# Altium PCB ElectromagneticPositioning.PcbDoc (part 3 of 3)
Units mm, origin at the board's own origin, x right, y up, seen from the top; angles counter-clockwise.
Board outline 163.96 x 78.23 mm, 2 copper layers (Top Layer, Bottom Layer); 269 components, 166 nets, 989 pads, 249 vias.
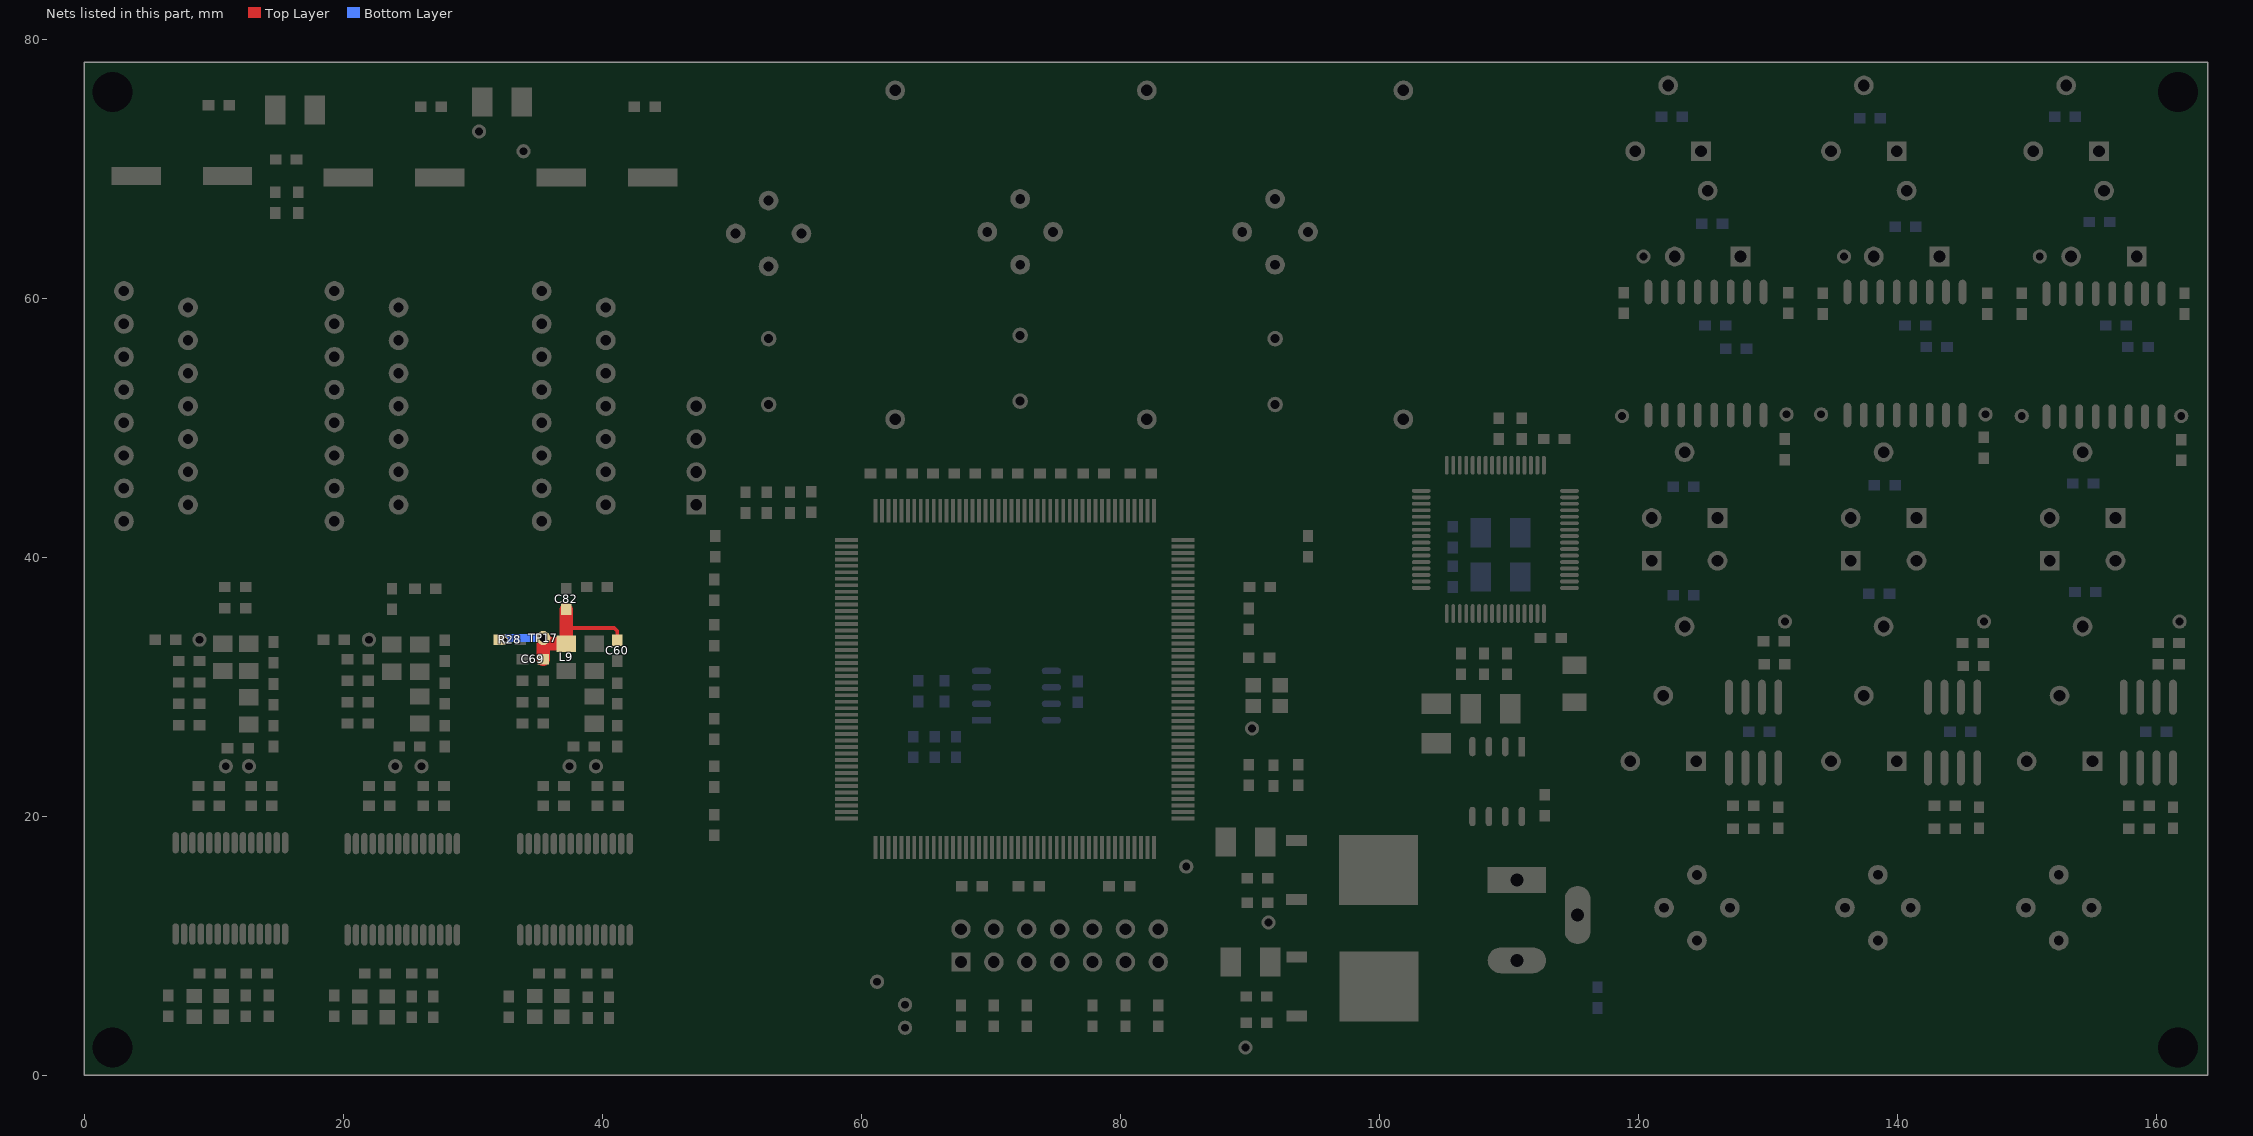
[diagram p3: the nets of this part, all layers, seen from the top]

## Via types
v1: diameter 0.305, hole 0.203, Top Layer to Bottom Layer, 111 vias
v2: diameter 0.381, hole 0.254, Top Layer to Bottom Layer, 76 vias
v3: diameter 0.457, hole 0.305, Top Layer to Bottom Layer, 34 vias
v4: diameter 0.508, hole 0.381, Top Layer to Bottom Layer, 14 vias
v5: diameter 0.457, hole 0.381, Top Layer to Bottom Layer, 8 vias
v6: diameter 0.762, hole 0.457, Top Layer to Bottom Layer, 4 vias
v7: diameter 0.508, hole 0.457, Top Layer to Bottom Layer, 1 vias
v8: diameter 0.559, hole 0.381, Top Layer to Bottom Layer, 1 vias

## Nets (pads, with @x,y where several pads share a name; then routed paths per layer and width w, separated by ;. In a path a pad name is that pad's centre, name@x,y a point inside that pad or via, vN(x,y) a via of type N, cw(c..) or ccw(c..) an arc to the next point about the centre after c; other vN are vias at no path point) (continued)
WAVE_C: C60.2 C69.2 C82.1 L9.2 R28.2 TP17.1 | length 14
  Top Layer w0.305: 37.211,34.544 40.915,34.544 41.148,34.311 C60.2@41.148,33.604
  Top Layer w1.016: C69.2@35.433,32.131 TP17.1@35.433,33.782 35.873,33.342 L9.2@37.211,33.342 37.211,34.544 C82.1@37.211,35.992
  Bottom Layer w0.61: v2(32.512,33.655) 32.639,33.782 TP17.1@35.433,33.782
pads on no net: P1.6 U3.27 U3.28 U3.35 U3.36 U3.37 U3.38 U3.39 U3.40 U3.41 U3.42 U3.46 U3.47 U3.48 U3.49 U3.50 U3.51 U3.52 U3.53 U3.65 U3.66 U3.67 U3.68 U3.69 U3.72 U3.73 U3.74 U3.75 U3.81 U3.82 U3.102 U3.115 U3.116 U3.119 U3.122 U3.123 U3.124 U3.135 U3.136 U3.137 U3.138 U3.141 U3.142 U3.145 U3.148 U3.149 U3.150 U3.151 U3.152 U3.153 U3.156 U3.157 U3.158 U3.161 U3.162 U3.163 U3.164 U3.165 U3.168 U3.169 U3.172 U3.173 U3.174 U3.175 U4.6 U5.13 U5.14 U5.15 U5.16 U6.13 U6.14 U6.15 U6.16 U7.13 U7.14 U7.15 U7.16 U8.5 U8.10 U8.11 U8.14 U8.15 U9.5 U9.10 U9.11 U9.14 U9.15 U10.5 U10.10 U10.11 U10.14 U10.15 U11.2 U11.3 U11.5 U11.6 U11.7 U11.13 U11.15 U12.2 U12.3 U12.5 U12.6 U12.7 U12.13 U12.15 U13.2 U13.3 U13.5 U13.6 U13.7 U13.13 U13.15 U14.1 U14.6 U14.7 U15.15 X1.1 X2.1 X3.1 X4.1

## Polygon pours and split planes (outlines as drawn)
GND on Top Layer "BottomLayer-GND" (solid, remove dead copper, pour order 6): -0.381,0.508 -0.381,78.994 164.592,78.994 164.592,-0.381
AGND on Bottom Layer "BottomLayer-GND" (solid, remove dead copper, pour order 8): -0.381,78.613 -0.381,-0.254 164.338,-0.254 164.338,78.74

## Keep-outs
Keep-Out Layer:
  the board outline again, w0.254

## Other copper
Top Layer:
  text "Electromagnetic Positioning V1.0" at 1.651,33.909 h2.03 r270

## Silkscreen, mask and mechanical layers (free items; w line width, h text height)
Top Overlay:
  text "MUTE" at 31.369,72.517 h1.2
  text "ST-BY" at 29.972,70.993 h1.2
  text "H_F_A" at 151.384,64.389 h1.27 r90
  text "H_F_C" at 120.904,64.262 h1.27 r90
  text "H_F_B" at 136.271,64.262 h1.27 r90
  text "L_F_C" at 119.126,52.07 h1.27 r90
  text "B_F_C" at 131.826,52.07 h1.27 r90
  text "L_F_B" at 134.493,52.07 h1.27 r90
  text "B_F_B" at 147.193,52.07 h1.27 r90
  text "L_F_A" at 149.86,52.07 h1.27 r90
  text "B_F_A" at 162.306,52.07 h1.27 r90
  text "T" at 48.895,49.403 h1.2 r270
  text "R" at 48.895,46.863 h1.2 r270
  text "G" at 48.895,44.323 h1.2 r270
  text "OA_C" at 127.508,34.671 h1.27
  text "OA_B" at 143.002,34.671 h1.27
  text "OA_A" at 158.242,34.671 h1.27
  text "WAVE_C" at 33.401,34.544 h1.2
  text "WAVE_A" at 6.858,34.417 h1.2
  text "WAVE_B" at 20.066,34.417 h1.2
  text "X_CLK" at 91.059,26.416 h1.2
  text "OUT_AP" at 5.842,23.495 h1.2
  text "OUT_AN" at 13.589,23.495 h1.2
  text "OUT_BP" at 18.796,23.495 h1.2
  text "OUT_BN" at 26.797,23.495 h1.2
  text "OUT_CP" at 32.385,23.495 h1.2
  text "OUT_CN" at 40.386,23.495 h1.2
  text "1V8" at 84.455,17.145 h1.2
  text "5V" at 109.601,16.51 h1.2
  text "TRS" at 66.548,13.081 h1.2
  text "GND" at 69.088,13.081 h1.2
  text "GND" at 74.168,13.081 h1.2
  text "GND" at 76.708,13.081 h1.2
  text "GND" at 79.248,13.081 h1.2
  text "EMU1" at 81.788,13.081 h1.2
  text "JTAG" at 84.963,12.573 h1.2 r270
  text "3V3" at 88.646,11.557 h1.2
  text "GND" at 117.856,11.176 h1.2 r90
  text "3V3" at 62.23,6.858 h1.2
  text "TMS" at 66.548,6.477 h1.2
  text "TDI" at 69.342,6.477 h1.2
  text "3.3" at 72.136,6.477 h1.2
  text "TDO" at 74.168,6.477 h1.2
  text "TCK" at 76.835,6.477 h1.2
  text "TCK" at 79.375,6.477 h1.2
  text "EMU0" at 81.788,6.477 h1.2
  text "AG" at 60.833,5.08 h1.2
  text "G" at 61.595,3.302 h1.2
  text "5V" at 90.551,2.032 h1.2
Bottom Overlay:
  text "MUTE" at 34.29,72.517 h1.2
  text "ST-BY" at 33.02,70.993 h1.2
  text "H_F_A" at 150.749,64.389 h1.27 r270
  text "H_F_C" at 120.269,64.262 h1.27 r270
  text "H_F_B" at 135.509,64.262 h1.27 r270
  text "L_F_C" at 118.491,52.07 h1.27 r270
  text "B_F_C" at 131.191,52.07 h1.27 r270
  text "L_F_B" at 133.858,52.07 h1.27 r270
  text "B_F_B" at 146.558,52.07 h1.27 r270
  text "L_F_A" at 149.352,52.07 h1.27 r270
  text "B_F_A" at 161.671,52.07 h1.27 r270
  text "OA_C" at 130.556,34.671 h1.27
  text "OA_B" at 145.923,34.671 h1.27
  text "OA_A" at 161.163,34.671 h1.27
  text "WAVE_C" at 37.973,34.544 h1.2
  text "WAVE_A" at 11.176,34.417 h1.2
  text "WAVE_B" at 24.511,34.417 h1.2
  text "X_CLK" at 94.488,26.416 h1.2
  text "OUT_AP" at 10.033,23.495 h1.2
  text "OUT_AN" at 17.907,23.495 h1.2
  text "OUT_BP" at 23.114,23.495 h1.2
  text "OUT_BN" at 31.115,23.495 h1.2
  text "OUT_CP" at 36.703,23.495 h1.2
  text "OUT_CN" at 44.704,23.495 h1.2
  text "1V8" at 86.233,17.145 h1.2
  text "3V3" at 90.424,11.557 h1.2
  text "3V3" at 64.008,6.858 h1.2
  text "AG" at 62.357,5.08 h1.2
  text "G" at 62.357,3.302 h1.2
  text "5V" at 91.821,2.032 h1.2
Top Solder:
  lines w0.762: 45.466,66.548 47.371,64.643 47.371,57.15 ; 47.498,57.15 52.832,51.816 ; 56.515,56.769 62.611,50.673 ; 66.167,53.975 78.74,53.975 82.042,50.673
  lines w1.27: 50.419,65.151 52.959,67.691 54.356,67.691 62.738,76.073 ; 52.832,56.896 52.832,62.357 ; 52.832,62.484 55.372,65.024 ; 69.723,65.151 72.263,67.691 73.66,67.691 82.042,76.073 ; 72.263,57.15 72.263,62.611 74.803,65.151 ; 89.408,65.151 91.948,67.691 93.472,67.691 101.854,76.073 ; 91.948,56.896 91.948,62.611 94.488,65.151
  text "Electromagnetic Positioning V1.0" at 1.651,33.909 h2.03 r270
Bottom Solder:
  lines w0.762: 9.017,66.548 45.466,66.548 ; 14.732,59.309 20.701,65.278 48.006,65.278 56.515,56.769 ; 19.431,60.833 22.733,64.135 ; 22.666,64.151 43.291,64.151 52.197,55.245 69.088,55.245 72.263,52.07 ; 24.257,59.309 27.813,62.865 42.418,62.865 51.308,53.975 65.913,53.975 ; 35.56,60.833 42.672,60.833 50.546,52.959 65.024,52.959 67.818,50.165 78.74,50.165 81.026,52.451 91.313,52.451 91.948,51.816 ; 40.259,59.309 42.291,59.309 52.705,48.895 89.281,48.895 91.059,50.673 101.854,50.673
  lines w1.27: 3.048,60.579 9.017,66.548

## Text inside footprints (layer, text, board x,y; h text height)
C74: Top Overlay "+" at 4.639,66.651 h2
C81: Top Overlay "+" at 21.022,66.524 h2
C87: Top Overlay "+" at 37.47,66.524 h2